# Altium PCB BuySellDisplay3.PcbDoc
Units mm, origin at the board's own origin, x right, y up, seen from the top; angles counter-clockwise.
Board outline 360 x 160 mm, 2 copper layers (Top Layer, Bottom Layer); 219 components, 207 nets, 586 pads, 108 vias.
Unrouted connection lines stored in the file: 312.
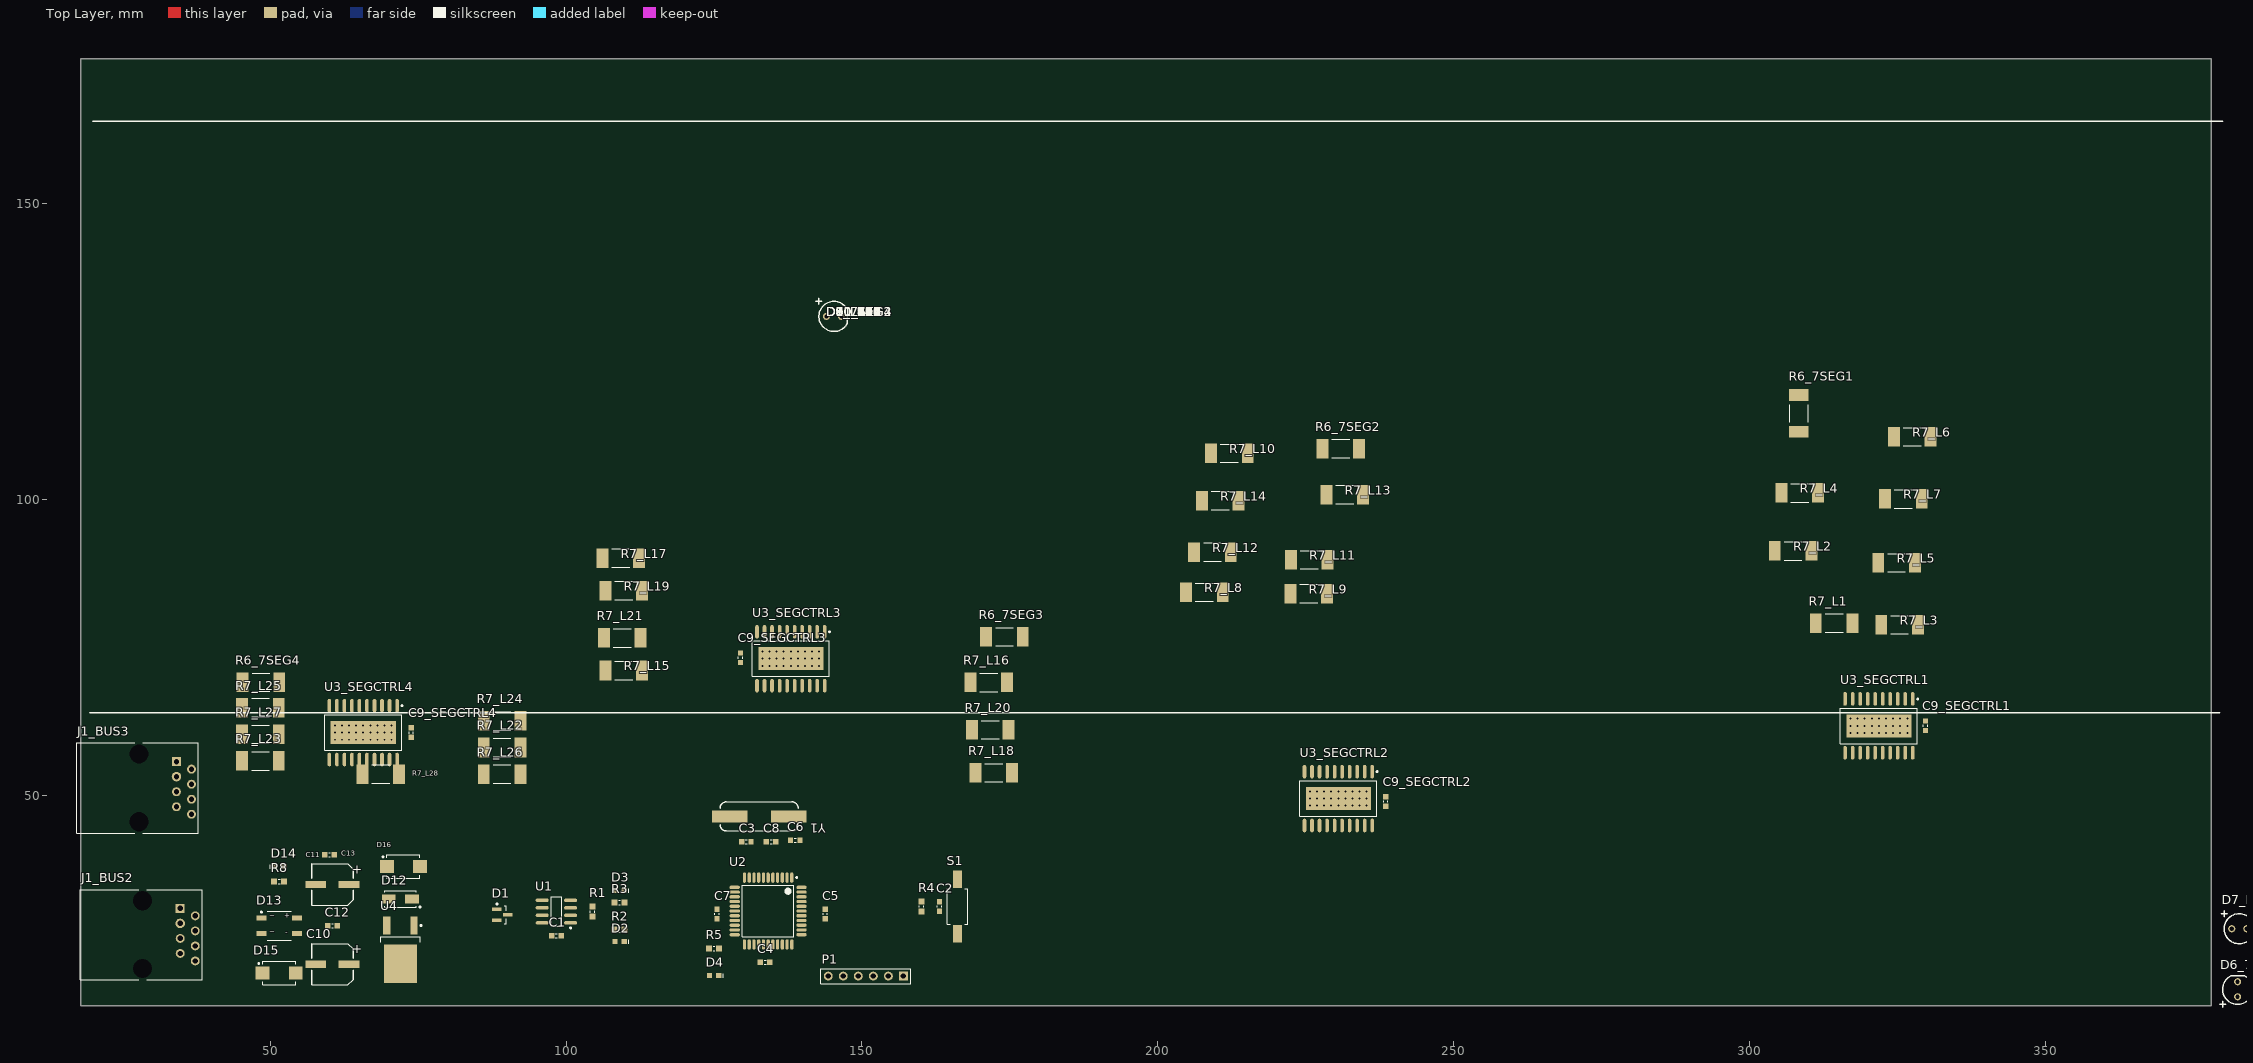
[diagram p0: Top Layer view]
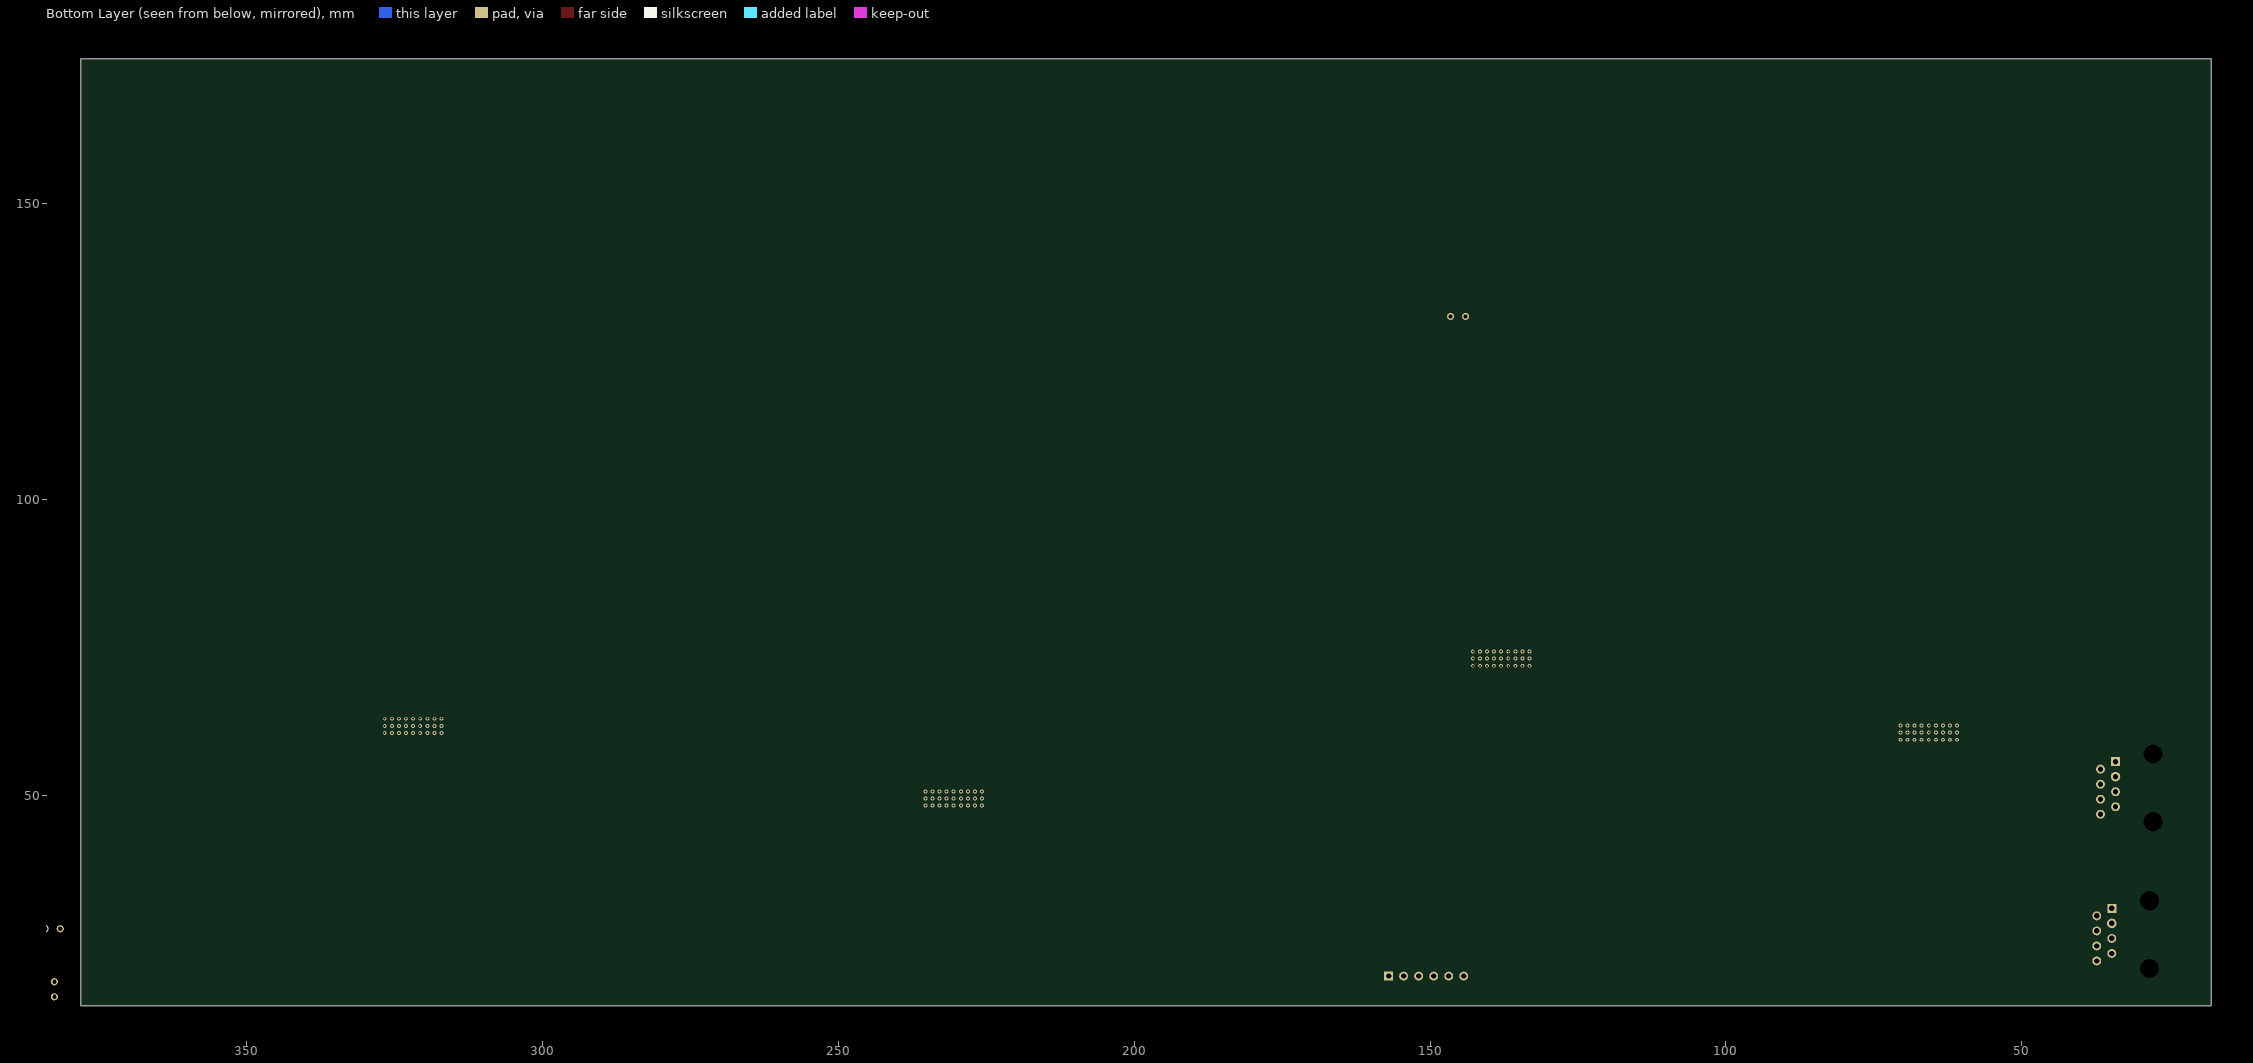
[diagram p1: Bottom Layer view, seen from below]

## Layer stack, top to bottom
Top Layer: signal copper 0.0356
Dielectric: dielectric 0.32, FR-4, Dk 4.8
Bottom Layer: signal copper 0.0356

## Board outline
18,14.5 18,174.5 378,174.5 378,14.5

## Design rules (kind name [scope] priority, off if disabled: settings)
Clearance [All] p1: gap=0.254
ComponentClearance [All] p1: gap=0.254 collisioncheckmode=3 verticalgap=0.254
PolygonConnect [All] p1: connectstyle=Relief reliefconductorwidth=0.254 reliefentries=4 polygonreliefangle="90 Angle"
RoomDefinition 7SEG1 [InComponentClass('7SEG1')] p1: confinementstyle=ConfineIn formatcopy=TRUE lockcomponents=FALSE outline 378.999,13.5 391.499,13.5 391.499,23 378.999,23
RoomDefinition 7SEG2 [InComponentClass('7SEG2')] p2: confinementstyle=ConfineIn formatcopy=TRUE lockcomponents=FALSE outline 141.497,127.997 156.497,127.997 156.497,134.497 141.497,134.497
RoomDefinition 7SEG3 [InComponentClass('7SEG3')] p3: confinementstyle=ConfineIn formatcopy=TRUE lockcomponents=FALSE outline 141.497,127.997 156.497,127.997 156.497,134.497 141.497,134.497
RoomDefinition 7SEG4 [InComponentClass('7SEG4')] p4: confinementstyle=ConfineIn formatcopy=TRUE lockcomponents=FALSE outline 141.497,127.997 156.497,127.997 156.497,134.497 141.497,134.497
RoomDefinition L1 [InComponentClass('L1')] p5: confinementstyle=ConfineIn formatcopy=TRUE lockcomponents=FALSE outline 378.999,24.5 422.499,24.5 422.499,34 378.999,34
RoomDefinition L4 [InComponentClass('L4')] p6: confinementstyle=ConfineIn formatcopy=TRUE lockcomponents=FALSE outline 141.497,127.997 152.997,127.997 152.997,134.497 141.497,134.497
RoomDefinition L6 [InComponentClass('L6')] p7: confinementstyle=ConfineIn formatcopy=TRUE lockcomponents=FALSE outline 141.497,127.997 152.997,127.997 152.997,134.497 141.497,134.497
RoomDefinition L7 [InComponentClass('L7')] p8: confinementstyle=ConfineIn formatcopy=TRUE lockcomponents=FALSE outline 141.497,127.997 152.997,127.997 152.997,134.497 141.497,134.497
RoomDefinition L9 [InComponentClass('L9')] p9: confinementstyle=ConfineIn formatcopy=TRUE lockcomponents=FALSE outline 141.497,127.997 152.997,127.997 152.997,134.497 141.497,134.497
RoomDefinition L10 [InComponentClass('L10')] p10: confinementstyle=ConfineIn formatcopy=TRUE lockcomponents=FALSE outline 141.497,127.997 154.497,127.997 154.497,134.497 141.497,134.497
RoomDefinition L11 [InComponentClass('L11')] p11: confinementstyle=ConfineIn formatcopy=TRUE lockcomponents=FALSE outline 141.497,127.997 153.997,127.997 153.997,134.497 141.497,134.497
RoomDefinition L12 [InComponentClass('L12')] p12: confinementstyle=ConfineIn formatcopy=TRUE lockcomponents=FALSE outline 141.497,127.997 154.497,127.997 154.497,134.497 141.497,134.497
RoomDefinition L14 [InComponentClass('L14')] p13: confinementstyle=ConfineIn formatcopy=TRUE lockcomponents=FALSE outline 141.497,127.997 154.497,127.997 154.497,134.497 141.497,134.497
RoomDefinition L15 [InComponentClass('L15')] p14: confinementstyle=ConfineIn formatcopy=TRUE lockcomponents=FALSE outline 141.497,127.997 154.497,127.997 154.497,134.497 141.497,134.497
RoomDefinition L16 [InComponentClass('L16')] p15: confinementstyle=ConfineIn formatcopy=TRUE lockcomponents=FALSE outline 141.497,127.997 154.497,127.997 154.497,134.497 141.497,134.497
RoomDefinition L17 [InComponentClass('L17')] p16: confinementstyle=ConfineIn formatcopy=TRUE lockcomponents=FALSE outline 141.497,127.997 154.497,127.997 154.497,134.497 141.497,134.497
RoomDefinition L18 [InComponentClass('L18')] p17: confinementstyle=ConfineIn formatcopy=TRUE lockcomponents=FALSE outline 141.497,127.997 154.497,127.997 154.497,134.497 141.497,134.497
RoomDefinition L19 [InComponentClass('L19')] p18: confinementstyle=ConfineIn formatcopy=TRUE lockcomponents=FALSE outline 141.497,127.997 154.497,127.997 154.497,134.497 141.497,134.497
RoomDefinition L20 [InComponentClass('L20')] p19: confinementstyle=ConfineIn formatcopy=TRUE lockcomponents=FALSE outline 141.497,127.997 154.497,127.997 154.497,134.497 141.497,134.497
RoomDefinition L21 [InComponentClass('L21')] p20: confinementstyle=ConfineIn formatcopy=TRUE lockcomponents=FALSE outline 141.497,127.997 153.997,127.997 153.997,134.497 141.497,134.497
RoomDefinition L22 [InComponentClass('L22')] p21: confinementstyle=ConfineIn formatcopy=TRUE lockcomponents=FALSE outline 141.497,127.997 154.497,127.997 154.497,134.497 141.497,134.497
RoomDefinition L23 [InComponentClass('L23')] p22: confinementstyle=ConfineIn formatcopy=TRUE lockcomponents=FALSE outline 141.497,127.997 154.497,127.997 154.497,134.497 141.497,134.497
RoomDefinition L24 [InComponentClass('L24')] p23: confinementstyle=ConfineIn formatcopy=TRUE lockcomponents=FALSE outline 141.497,127.997 154.497,127.997 154.497,134.497 141.497,134.497
RoomDefinition L25 [InComponentClass('L25')] p24: confinementstyle=ConfineIn formatcopy=TRUE lockcomponents=FALSE outline 141.497,127.997 154.497,127.997 154.497,134.497 141.497,134.497
RoomDefinition L26 [InComponentClass('L26')] p25: confinementstyle=ConfineIn formatcopy=TRUE lockcomponents=FALSE outline 141.497,127.997 154.497,127.997 154.497,134.497 141.497,134.497
RoomDefinition L27 [InComponentClass('L27')] p26: confinementstyle=ConfineIn formatcopy=TRUE lockcomponents=FALSE outline 141.497,127.997 154.497,127.997 154.497,134.497 141.497,134.497
RoomDefinition L28 [InComponentClass('L28')] p27: confinementstyle=ConfineIn formatcopy=TRUE lockcomponents=FALSE outline 1148.5,1253.5 1260,1253.5 1260,1085.5 1148.5,1085.5
RoomDefinition BUS2 [InComponentClass('BUS2')] p28: confinementstyle=ConfineIn formatcopy=TRUE lockcomponents=FALSE outline 17.624,34.502 17.624,18.5 41.5,18.5 41.5,34.502
RoomDefinition BUS3 [InComponentClass('BUS3')] p29: confinementstyle=ConfineIn formatcopy=TRUE lockcomponents=FALSE outline 16.5,59.288 16.5,41 38.09,41 38.09,59.288
RoomDefinition COM485 [InComponentClass('COM485')] p30: confinementstyle=ConfineIn formatcopy=TRUE lockcomponents=FALSE outline 116.639,39.534 84,39.534 84,21.5 116.639,21.5
RoomDefinition CPU [InComponentClass('CPU')] p31: confinementstyle=ConfineIn formatcopy=TRUE lockcomponents=FALSE outline 170.713,54.37 117.5,54.37 117.5,15 170.713,15
RoomDefinition L2 [InComponentClass('L2')] p32: confinementstyle=ConfineIn formatcopy=TRUE lockcomponents=FALSE outline 141.497,127.997 152.997,127.997 152.997,134.497 141.497,134.497
RoomDefinition L3 [InComponentClass('L3')] p33: confinementstyle=ConfineIn formatcopy=TRUE lockcomponents=FALSE outline 141.497,127.997 152.997,127.997 152.997,134.497 141.497,134.497
RoomDefinition L5 [InComponentClass('L5')] p34: confinementstyle=ConfineIn formatcopy=TRUE lockcomponents=FALSE outline 141.497,127.997 152.997,127.997 152.997,134.497 141.497,134.497
RoomDefinition L8 [InComponentClass('L8')] p35: confinementstyle=ConfineIn formatcopy=TRUE lockcomponents=FALSE outline 141.497,127.997 152.997,127.997 152.997,134.497 141.497,134.497
RoomDefinition L13 [InComponentClass('L13')] p36: confinementstyle=ConfineIn formatcopy=TRUE lockcomponents=FALSE outline 141.497,127.997 154.497,127.997 154.497,134.497 141.497,134.497
RoomDefinition SEGCTRL1 [InComponentClass('SEGCTRL1')] p37: confinementstyle=ConfineIn formatcopy=TRUE lockcomponents=FALSE outline 304.337,43 338.5,43 338.5,71.448 304.337,71.448
RoomDefinition SEGCTRL2 [InComponentClass('SEGCTRL2')] p38: confinementstyle=ConfineIn formatcopy=TRUE lockcomponents=FALSE outline 214.5,70.5 214.5,42.5 256.5,42.5 256.5,70.5
RoomDefinition SEGCTRL3 [InComponentClass('SEGCTRL3')] p39: confinementstyle=ConfineIn formatcopy=TRUE lockcomponents=FALSE outline 122.5,85 122.5,56.64 154,56.64 154,85
RoomDefinition SEGCTRL4 [InComponentClass('SEGCTRL4')] p40: confinementstyle=ConfineIn formatcopy=TRUE lockcomponents=FALSE outline 57.322,51.5 84.5,51.5 84.5,70.042 57.322,70.042
RoomDefinition SUPPLY [InComponentClass('SUPPLY')] p41: confinementstyle=ConfineIn formatcopy=TRUE lockcomponents=FALSE outline 44,15.5 112.453,15.5 112.453,45.732 44,45.732
RoutingVias [All] p1: holewidth=0.711 width=1.27 viastyle="Through Hole" minholewidth=0.711 minwidth=1.27 maxholewidth=0.711 maxwidth=1.27
SolderMaskExpansion [All] p1: expansion=0.102
TestPointUsage [All] p1: valid=0 allowmultiple=FALSE
Testpoint [All] p1: side=15 testpointundercomponent=TRUE minsize=1.016 maxsize=2.54 preferedsize=1.524 minholesize=0 maxholesize=1.016 preferedholesize=0.813 testpointgrid=0.025 style=1023 order=0123456789
Width [All] p1: maxlimit=0.254 minlimit=0.254 preferedwidth=0.254
18 further rules are at their usual default settings.

## Classes and differential pairs
channel class TPIC6B595_CommunicationInterface: SEGCTRL1 SEGCTRL2 SEGCTRL3 SEGCTRL4
channel class Line: L1 L2 L3 L4 L5 L6 L7 L8 L9 L10 L11 L12 L13 L14 L15 L16 L17 L18 L19 L20 L21 L22 L23 L24 L25 L26 L27 L28
channel class Led7Seg: 7SEG1 7SEG2 7SEG3 7SEG4
channel class BUSConnector: BUS2 BUS3
component class SUPPLY: C10 C11 C12 C13 D12 D13 D14 D15 D16 R8 U4
component class SEGCTRL4: C9_SEGCTRL4 U3_SEGCTRL4
component class SEGCTRL3: C9_SEGCTRL3 U3_SEGCTRL3
component class SEGCTRL2: C9_SEGCTRL2 U3_SEGCTRL2
component class SEGCTRL1: C9_SEGCTRL1 U3_SEGCTRL1
component class L28: D7_L28 D8_L28 D9_L28 D10_L28 D11_L28 R7_L28
component class L27: D7_L27 D8_L27 D9_L27 D10_L27 D11_L27 R7_L27
component class L26: D7_L26 D8_L26 D9_L26 D10_L26 D11_L26 R7_L26
component class L25: D7_L25 D8_L25 D9_L25 D10_L25 D11_L25 R7_L25
component class L24: D7_L24 D8_L24 D9_L24 D10_L24 D11_L24 R7_L24
component class L23: D7_L23 D8_L23 D9_L23 D10_L23 D11_L23 R7_L23
component class L22: D7_L22 D8_L22 D9_L22 D10_L22 D11_L22 R7_L22
component class L21: D7_L21 D8_L21 D9_L21 D10_L21 D11_L21 R7_L21
component class L20: D7_L20 D8_L20 D9_L20 D10_L20 D11_L20 R7_L20
component class L19: D7_L19 D8_L19 D9_L19 D10_L19 D11_L19 R7_L19
component class L18: D7_L18 D8_L18 D9_L18 D10_L18 D11_L18 R7_L18
component class L17: D7_L17 D8_L17 D9_L17 D10_L17 D11_L17 R7_L17
component class L16: D7_L16 D8_L16 D9_L16 D10_L16 D11_L16 R7_L16
component class L15: D7_L15 D8_L15 D9_L15 D10_L15 D11_L15 R7_L15
component class L14: D7_L14 D8_L14 D9_L14 D10_L14 D11_L14 R7_L14
component class L13: D7_L13 D8_L13 D9_L13 D10_L13 D11_L13 R7_L13
component class L12: D7_L12 D8_L12 D9_L12 D10_L12 D11_L12 R7_L12
component class L11: D7_L11 D8_L11 D9_L11 D10_L11 D11_L11 R7_L11
component class L10: D7_L10 D8_L10 D9_L10 D10_L10 D11_L10 R7_L10
component class L9: D7_L9 D8_L9 D9_L9 D10_L9 D11_L9 R7_L9
component class L8: D7_L8 D8_L8 D9_L8 D10_L8 D11_L8 R7_L8
component class L7: D7_L7 D8_L7 D9_L7 D10_L7 D11_L7 R7_L7
component class L6: D7_L6 D8_L6 D9_L6 D10_L6 D11_L6 R7_L6
component class L5: D7_L5 D8_L5 D9_L5 D10_L5 D11_L5 R7_L5
component class L4: D7_L4 D8_L4 D9_L4 D10_L4 D11_L4 R7_L4
component class L3: D7_L3 D8_L3 D9_L3 D10_L3 D11_L3 R7_L3
component class L2: D7_L2 D8_L2 D9_L2 D10_L2 D11_L2 R7_L2
component class L1: D7_L1 D8_L1 D9_L1 D10_L1 D11_L1 R7_L1
component class CPU: C2 C3 C4 C5 C6 C7 C8 D4 P1 R4 R5 S1 U2 Y1
component class COM485: C1 D1 D2 D3 R1 R2 R3 U1
component class BUS3: J1_BUS3
component class BUS2: J1_BUS2
component class 7SEG4: D6_7SEG4 R6_7SEG4
component class 7SEG3: D6_7SEG3 R6_7SEG3
component class 7SEG2: D6_7SEG2 R6_7SEG2
component class 7SEG1: D6_7SEG1 R6_7SEG1

## Components (designator, comment, footprint, x,y, rotation, side; value= is the part's Value field where it differs from the comment)
C1 "CAP0.1uF" CAP0603 98.351,26.326 r0 top
C2 "CAP0.1uF" CAP0603 163.093,31.256 r270 top
C3 "C18pF" CAP0603 130.454,42.178 r180 top
C4 "CAP0.1uF" CAP0603 133.629,21.858 r0 top
C5 "CAP0.1uF" CAP0603 143.789,29.986 r90 top
C6 "CAP0.1uF" CAP0603 138.709,42.432 r0 top
C7 "CAP0.1uF" CAP0603 125.501,29.986 r270 top
C8 "C18pF" CAP0603 134.645,42.178 r0 top
C9_SEGCTRL1 "CAP0.1uF" CAP0603 329.737,61.796 r270 top (schematic designator C9)
C9_SEGCTRL2 "CAP0.1uF" CAP0603 238.5,49 r270 top (schematic designator C9)
C9_SEGCTRL3 "CAP0.1uF" CAP0603 129.472,73.29 r270 top (schematic designator C9)
C9_SEGCTRL4 "CAP0.1uF" CAP0603 73.832,60.644 r270 top (schematic designator C9)
C10 "EEH-ZA1E101XP" EEH-ZA1E101XP 60.5,21.5 r180 top
C11 "25SVPF47M" EEH-ZA1E101XP 60.5,35 r180 top
C12 "CAP0.1uF" CAP0603 60.5,28 r180 top
C13 "CAP0.1uF" CAP0603 60,40 r180 top
D1 "SM712" SW712 89.207,29.882 r0 top
D2 "150060YS75000" 150060YS75000 109.019,25.31 r180 top
D3 "150060YS75000" 150060YS75000 109.019,33.946 r180 top
D4 "150060YS75000" 150060YS75000 124.993,19.572 r180 top
D6_7SEG1 "HBLED" LED 382.499,16 r90 top (schematic designator D6)
D6_7SEG2 "HBLED" LED 143.987,130.987 r0 top (schematic designator D6)
D6_7SEG3 "HBLED" LED 143.987,130.987 r0 top (schematic designator D6)
D6_7SEG4 "HBLED" LED 143.987,130.987 r0 top (schematic designator D6)
D7_L1 "HBLED" LED 381.499,27.5 r0 top (schematic designator D7)
D7_L2 "HBLED" LED 143.987,130.987 r0 top (schematic designator D7)
D7_L3 "HBLED" LED 143.987,130.987 r0 top (schematic designator D7)
D7_L4 "HBLED" LED 143.987,130.987 r0 top (schematic designator D7)
D7_L5 "HBLED" LED 143.987,130.987 r0 top (schematic designator D7)
D7_L6 "HBLED" LED 143.987,130.987 r0 top (schematic designator D7)
D7_L7 "HBLED" LED 143.987,130.987 r0 top (schematic designator D7)
D7_L8 "HBLED" LED 143.987,130.987 r0 top (schematic designator D7)
D7_L9 "HBLED" LED 143.987,130.987 r0 top (schematic designator D7)
D7_L10 "HBLED" LED 143.987,130.987 r0 top (schematic designator D7)
D7_L11 "HBLED" LED 143.987,130.987 r0 top (schematic designator D7)
D7_L12 "HBLED" LED 143.987,130.987 r0 top (schematic designator D7)
D7_L13 "HBLED" LED 143.987,130.987 r0 top (schematic designator D7)
D7_L14 "HBLED" LED 143.987,130.987 r0 top (schematic designator D7)
D7_L15 "HBLED" LED 143.987,130.987 r0 top (schematic designator D7)
D7_L16 "HBLED" LED 143.987,130.987 r0 top (schematic designator D7)
D7_L17 "HBLED" LED 143.987,130.987 r0 top (schematic designator D7)
D7_L18 "HBLED" LED 143.987,130.987 r0 top (schematic designator D7)
D7_L19 "HBLED" LED 143.987,130.987 r0 top (schematic designator D7)
D7_L20 "HBLED" LED 143.987,130.987 r0 top (schematic designator D7)
D7_L21 "HBLED" LED 143.987,130.987 r0 top (schematic designator D7)
D7_L22 "HBLED" LED 143.987,130.987 r0 top (schematic designator D7)
D7_L23 "HBLED" LED 143.987,130.987 r0 top (schematic designator D7)
D7_L24 "HBLED" LED 143.987,130.987 r0 top (schematic designator D7)
D7_L25 "HBLED" LED 143.987,130.987 r0 top (schematic designator D7)
D7_L26 "HBLED" LED 143.987,130.987 r0 top (schematic designator D7)
D7_L27 "HBLED" LED 143.987,130.987 r0 top (schematic designator D7)
D7_L28 "HBLED" LED 1205.49,1142.49 r0 top (schematic designator D7)
D8_L1 "HBLED" LED 389.999,27.5 r0 top (schematic designator D8)
D8_L2 "HBLED" LED 143.987,130.987 r0 top (schematic designator D8)
D8_L3 "HBLED" LED 143.987,130.987 r0 top (schematic designator D8)
D8_L4 "HBLED" LED 143.987,130.987 r0 top (schematic designator D8)
D8_L5 "HBLED" LED 143.987,130.987 r0 top (schematic designator D8)
D8_L6 "HBLED" LED 143.987,130.987 r0 top (schematic designator D8)
D8_L7 "HBLED" LED 143.987,130.987 r0 top (schematic designator D8)
D8_L8 "HBLED" LED 143.987,130.987 r0 top (schematic designator D8)
D8_L9 "HBLED" LED 143.987,130.987 r0 top (schematic designator D8)
D8_L10 "HBLED" LED 143.987,130.987 r0 top (schematic designator D8)
D8_L11 "HBLED" LED 143.987,130.987 r0 top (schematic designator D8)
D8_L12 "HBLED" LED 143.987,130.987 r0 top (schematic designator D8)
D8_L13 "HBLED" LED 143.987,130.987 r0 top (schematic designator D8)
D8_L14 "HBLED" LED 143.987,130.987 r0 top (schematic designator D8)
D8_L15 "HBLED" LED 143.987,130.987 r0 top (schematic designator D8)
D8_L16 "HBLED" LED 143.987,130.987 r0 top (schematic designator D8)
D8_L17 "HBLED" LED 143.987,130.987 r0 top (schematic designator D8)
D8_L18 "HBLED" LED 143.987,130.987 r0 top (schematic designator D8)
D8_L19 "HBLED" LED 143.987,130.987 r0 top (schematic designator D8)
D8_L20 "HBLED" LED 143.987,130.987 r0 top (schematic designator D8)
D8_L21 "HBLED" LED 143.987,130.987 r0 top (schematic designator D8)
D8_L22 "HBLED" LED 143.987,130.987 r0 top (schematic designator D8)
D8_L23 "HBLED" LED 143.987,130.987 r0 top (schematic designator D8)
D8_L24 "HBLED" LED 143.987,130.987 r0 top (schematic designator D8)
D8_L25 "HBLED" LED 143.987,130.987 r0 top (schematic designator D8)
D8_L26 "HBLED" LED 143.987,130.987 r0 top (schematic designator D8)
D8_L27 "HBLED" LED 143.987,130.987 r0 top (schematic designator D8)
D8_L28 "HBLED" LED 1205.49,1142.49 r0 top (schematic designator D8)
D9_L1 "HBLED" LED 397.999,27.5 r0 top (schematic designator D9)
D9_L2 "HBLED" LED 143.987,130.987 r0 top (schematic designator D9)
D9_L3 "HBLED" LED 143.987,130.987 r0 top (schematic designator D9)
D9_L4 "HBLED" LED 143.987,130.987 r0 top (schematic designator D9)
D9_L5 "HBLED" LED 143.987,130.987 r0 top (schematic designator D9)
D9_L6 "HBLED" LED 143.987,130.987 r0 top (schematic designator D9)
D9_L7 "HBLED" LED 143.987,130.987 r0 top (schematic designator D9)
D9_L8 "HBLED" LED 143.987,130.987 r0 top (schematic designator D9)
D9_L9 "HBLED" LED 143.987,130.987 r0 top (schematic designator D9)
D9_L10 "HBLED" LED 143.987,130.987 r0 top (schematic designator D9)
D9_L11 "HBLED" LED 143.987,130.987 r0 top (schematic designator D9)
D9_L12 "HBLED" LED 143.987,130.987 r0 top (schematic designator D9)
D9_L13 "HBLED" LED 143.987,130.987 r0 top (schematic designator D9)
D9_L14 "HBLED" LED 143.987,130.987 r0 top (schematic designator D9)
D9_L15 "HBLED" LED 143.987,130.987 r0 top (schematic designator D9)
D9_L16 "HBLED" LED 143.987,130.987 r0 top (schematic designator D9)
D9_L17 "HBLED" LED 143.987,130.987 r0 top (schematic designator D9)
D9_L18 "HBLED" LED 143.987,130.987 r0 top (schematic designator D9)
D9_L19 "HBLED" LED 143.987,130.987 r0 top (schematic designator D9)
D9_L20 "HBLED" LED 143.987,130.987 r0 top (schematic designator D9)
D9_L21 "HBLED" LED 143.987,130.987 r0 top (schematic designator D9)
D9_L22 "HBLED" LED 143.987,130.987 r0 top (schematic designator D9)
D9_L23 "HBLED" LED 143.987,130.987 r0 top (schematic designator D9)
D9_L24 "HBLED" LED 143.987,130.987 r0 top (schematic designator D9)
D9_L25 "HBLED" LED 143.987,130.987 r0 top (schematic designator D9)
D9_L26 "HBLED" LED 143.987,130.987 r0 top (schematic designator D9)
D9_L27 "HBLED" LED 143.987,130.987 r0 top (schematic designator D9)
D9_L28 "HBLED" LED 1205.49,1142.49 r0 top (schematic designator D9)
D10_L1 "HBLED" LED 406.499,27.5 r0 top (schematic designator D10)
D10_L2 "HBLED" LED 143.987,130.987 r0 top (schematic designator D10)
D10_L3 "HBLED" LED 143.987,130.987 r0 top (schematic designator D10)
D10_L4 "HBLED" LED 143.987,130.987 r0 top (schematic designator D10)
D10_L5 "HBLED" LED 143.987,130.987 r0 top (schematic designator D10)
D10_L6 "HBLED" LED 143.987,130.987 r0 top (schematic designator D10)
D10_L7 "HBLED" LED 143.987,130.987 r0 top (schematic designator D10)
D10_L8 "HBLED" LED 143.987,130.987 r0 top (schematic designator D10)
D10_L9 "HBLED" LED 143.987,130.987 r0 top (schematic designator D10)
D10_L10 "HBLED" LED 143.987,130.987 r0 top (schematic designator D10)
D10_L11 "HBLED" LED 143.987,130.987 r0 top (schematic designator D10)
D10_L12 "HBLED" LED 143.987,130.987 r0 top (schematic designator D10)
D10_L13 "HBLED" LED 143.987,130.987 r0 top (schematic designator D10)
D10_L14 "HBLED" LED 143.987,130.987 r0 top (schematic designator D10)
D10_L15 "HBLED" LED 143.987,130.987 r0 top (schematic designator D10)
D10_L16 "HBLED" LED 143.987,130.987 r0 top (schematic designator D10)
D10_L17 "HBLED" LED 143.987,130.987 r0 top (schematic designator D10)
D10_L18 "HBLED" LED 143.987,130.987 r0 top (schematic designator D10)
D10_L19 "HBLED" LED 143.987,130.987 r0 top (schematic designator D10)
D10_L20 "HBLED" LED 143.987,130.987 r0 top (schematic designator D10)
D10_L21 "HBLED" LED 143.987,130.987 r0 top (schematic designator D10)
D10_L22 "HBLED" LED 143.987,130.987 r0 top (schematic designator D10)
D10_L23 "HBLED" LED 143.987,130.987 r0 top (schematic designator D10)
D10_L24 "HBLED" LED 143.987,130.987 r0 top (schematic designator D10)
D10_L25 "HBLED" LED 143.987,130.987 r0 top (schematic designator D10)
D10_L26 "HBLED" LED 143.987,130.987 r0 top (schematic designator D10)
D10_L27 "HBLED" LED 143.987,130.987 r0 top (schematic designator D10)
D10_L28 "HBLED" LED 1205.49,1142.49 r0 top (schematic designator D10)
D11_L1 "HBLED" LED 415.999,27.5 r0 top (schematic designator D11)
D11_L2 "HBLED" LED 143.987,130.987 r0 top (schematic designator D11)
D11_L3 "HBLED" LED 143.987,130.987 r0 top (schematic designator D11)
D11_L4 "HBLED" LED 143.987,130.987 r0 top (schematic designator D11)
D11_L5 "HBLED" LED 143.987,130.987 r0 top (schematic designator D11)
D11_L6 "HBLED" LED 143.987,130.987 r0 top (schematic designator D11)
D11_L7 "HBLED" LED 143.987,130.987 r0 top (schematic designator D11)
D11_L8 "HBLED" LED 143.987,130.987 r0 top (schematic designator D11)
D11_L9 "HBLED" LED 143.987,130.987 r0 top (schematic designator D11)
D11_L10 "HBLED" LED 143.987,130.987 r0 top (schematic designator D11)
D11_L11 "HBLED" LED 143.987,130.987 r0 top (schematic designator D11)
D11_L12 "HBLED" LED 143.987,130.987 r0 top (schematic designator D11)
D11_L13 "HBLED" LED 143.987,130.987 r0 top (schematic designator D11)
D11_L14 "HBLED" LED 143.987,130.987 r0 top (schematic designator D11)
D11_L15 "HBLED" LED 143.987,130.987 r0 top (schematic designator D11)
D11_L16 "HBLED" LED 143.987,130.987 r0 top (schematic designator D11)
D11_L17 "HBLED" LED 143.987,130.987 r0 top (schematic designator D11)
D11_L18 "HBLED" LED 143.987,130.987 r0 top (schematic designator D11)
D11_L19 "HBLED" LED 143.987,130.987 r0 top (schematic designator D11)
D11_L20 "HBLED" LED 143.987,130.987 r0 top (schematic designator D11)
D11_L21 "HBLED" LED 143.987,130.987 r0 top (schematic designator D11)
D11_L22 "HBLED" LED 143.987,130.987 r0 top (schematic designator D11)
D11_L23 "HBLED" LED 143.987,130.987 r0 top (schematic designator D11)
D11_L24 "HBLED" LED 143.987,130.987 r0 top (schematic designator D11)
D11_L25 "HBLED" LED 143.987,130.987 r0 top (schematic designator D11)
D11_L26 "HBLED" LED 143.987,130.987 r0 top (schematic designator D11)
D11_L27 "HBLED" LED 143.987,130.987 r0 top (schematic designator D11)
D11_L28 "HBLED" LED 1205.49,1142.49 r0 top (schematic designator D11)
D12 "S1M-E3/5AT" S1M-E3/5AT 72,32.5 r180 top
D13 "MB6S-E3/80" MB6S-E3/80 51.5,28 r0 top
D14 "150060YS75000" 150060YS75000 51.5,38 r0 top
D15 "SMBJ12A-E3/52" SMBJ5.0A 51.5,20 r0 top
D16 "SMBJ5.0A" SMBJ5.0A 72.5,38 r0 top
J1_BUS2 "15-43-6233" 15-43-6233 17.878,26.501 r270 top (schematic designator J1)
J1_BUS3 "15-43-6233" 15-43-6233 17.249,51.3 r270 top (schematic designator J1)
P1 "Header 6" HDR1X6 157,19.5 r180 top
R1 "RK73B1HTTC472J" RES0603 104.447,30.39 r270 top
R2 "RK73B1HTTC472J" RES0603 109.019,27.342 r180 top
R3 "RK73B1HTTC472J" RES0603 109.019,31.914 r180 top
R4 "RK73B1HTTC472J" RES0603 160.045,31.256 r270 top
R5 "RK73B1HTTC472J" RES0603 124.993,24.144 r180 top
R6_7SEG1 "CRCW2512470RJNEG" RES2512 308.358,114.588 r270 top (schematic designator R6)
R6_7SEG2 "CRCW2512470RJNEG" RES2512 230.922,108.646 r0 top (schematic designator R6)
R6_7SEG3 "CRCW2512470RJNEG" RES2512 174.078,76.854 r180 top (schematic designator R6)
R6_7SEG4 "CRCW2512470RJNEG" RES2512 48.422,69.146 r0 top (schematic designator R6)
R7_L1 "CRCW2512120RJNEG" RES2512 314.301,79.166 r180 top (schematic designator R7)
R7_L2 "CRCW2512120RJNEG" RES2512 307.358,91.368 r0 top (schematic designator R7)
R7_L3 "CRCW2512120RJNEG" RES2512 325.358,78.868 r0 top (schematic designator R7)
R7_L4 "CRCW2512120RJNEG" RES2512 308.494,101.146 r0 top (schematic designator R7)
R7_L5 "CRCW2512120RJNEG" RES2512 324.858,89.368 r0 top (schematic designator R7)
R7_L6 "CRCW2512120RJNEG" RES2512 327.494,110.646 r0 top (schematic designator R7)
R7_L7 "CRCW2512120RJNEG" RES2512 325.994,100.146 r0 top (schematic designator R7)
R7_L8 "CRCW2512120RJNEG" RES2512 207.858,84.368 r0 top (schematic designator R7)
R7_L9 "CRCW2512120RJNEG" RES2512 225.494,84.146 r0 top (schematic designator R7)
R7_L10 "CRCW2512120RJNEG" RES2512 212.088,107.868 r0 top (schematic designator R7)
R7_L11 "CRCW2512120RJNEG" RES2512 225.596,89.868 r0 top (schematic designator R7)
R7_L12 "CRCW2512120RJNEG" RES2512 209.224,91.146 r0 top (schematic designator R7)
R7_L13 "CRCW2512120RJNEG" RES2512 231.588,100.868 r0 top (schematic designator R7)
R7_L14 "CRCW2512120RJNEG" RES2512 210.55,99.868 r0 top (schematic designator R7)
R7_L15 "CRCW2512120RJNEG" RES2512 109.724,71.146 r0 top (schematic designator R7)
R7_L16 "CRCW2512120RJNEG" RES2512 171.412,69.132 r180 top (schematic designator R7)
R7_L17 "CRCW2512120RJNEG" RES2512 109.224,90.146 r0 top (schematic designator R7)
R7_L18 "CRCW2512120RJNEG" RES2512 172.276,53.854 r180 top (schematic designator R7)
R7_L19 "CRCW2512120RJNEG" RES2512 109.724,84.646 r0 top (schematic designator R7)
R7_L20 "CRCW2512120RJNEG" RES2512 171.666,61.132 r180 top (schematic designator R7)
R7_L21 "CRCW2512120RJNEG" RES2512 109.478,76.646 r0 top (schematic designator R7)
R7_L22 "CRCW2512120RJNEG" RES2512 89.166,58.132 r180 top (schematic designator R7)
R7_L23 "CRCW2512120RJNEG" RES2512 48.334,55.868 r0 top (schematic designator R7)
R7_L24 "CRCW2512120RJNEG" RES2512 89.166,62.632 r180 top (schematic designator R7)
R7_L25 "CRCW2512120RJNEG" RES2512 48.334,64.868 r0 top (schematic designator R7)
R7_L26 "CRCW2512120RJNEG" RES2512 89.166,53.632 r180 top (schematic designator R7)
R7_L27 "CRCW2512120RJNEG" RES2512 48.334,60.368 r0 top (schematic designator R7)
R7_L28 "CRCW2512120RJNEG" RES2512 68.669,53.635 r180 top (schematic designator R7)
R8 "RK73B1HTTC472J" RES0603 51.5,35.5 r0 top
S1 "SW-PB" microswitch 166.141,31.256 r270 top
U1 "MAX485CSA" NSO8_N 98.351,30.39 r180 top
U2 "ATmega1284P-AU" 44A_N 134.137,30.494 r270 top
U3_SEGCTRL1 "TPIC6B595" TPIC6B595DWR 321.863,61.796 r270 top (schematic designator U3)
U3_SEGCTRL2 "TPIC6B595" TPIC6B595DWR 230.5,49.5 r270 top (schematic designator U3)
U3_SEGCTRL3 "TPIC6B595" TPIC6B595DWR 137.97,73.14 r270 top (schematic designator U3)
U3_SEGCTRL4 "TPIC6B595" TPIC6B595DWR 65.704,60.644 r270 top (schematic designator U3)
U4 "MC7805CDTRKG" MC7805CDTRKG 72,24 r270 top
Y1 "XTAL" Crystal20MHz 132.613,46.496 r180 top

## Footprints (in the part's own frame and the unit in brackets; to place one, negate y for a bottom-side part, rotate by r counter-clockwise, add the part's x,y. Pads: shape width x height; smd on the part's side, far side on the other; paste and mask are expansions set on the pad)
15-43-6233 [mm] "Connector; PCB Jack, Thru-Hole; 1-Port; Unshielded without Lightpipes; Right Angle"
  rect 1.5x1.5 hole 0.9: 1(-4.445,16.89)
  round 1.5 hole 0.9: 2(-3.175,19.43) 4(-0.635,19.43) 5(0.635,16.89) 6(1.905,19.43) 7(3.175,16.89) 8(4.445,19.43)
  round 1.6 hole 0.9: 3(-1.905,16.89)
  round 2.95 hole 3.25 unplated: MH1(-5.715,10.54) MH2(5.715,10.54)
  silkscreen extent -7.62,0 7.62,20.58
44A_N [mm] "Thin QFP, 44-Leads, Body 10x10mm, Pitch 0.8mm, IPC Medium Density"
  oval 1.75x0.55 smd: 1(-5.65,4) 2(-5.65,3.2) 3(-5.65,2.4) 4(-5.65,1.6) 5(-5.65,0.8) 6(-5.65,0) 7(-5.65,-0.8) 8(-5.65,-1.6) 9(-5.65,-2.4) 10(-5.65,-3.2) 11(-5.65,-4) 23(5.65,-4) 24(5.65,-3.2) 25(5.65,-2.4) 26(5.65,-1.6) 27(5.65,-0.8) 28(5.65,0) 29(5.65,0.8) 30(5.65,1.6) 31(5.65,2.4) 32(5.65,3.2) 33(5.65,4)
  oval 0.55x1.75 smd: 12(-4,-5.65) 13(-3.2,-5.65) 14(-2.4,-5.65) 15(-1.6,-5.65) 16(-0.8,-5.65) 17(0,-5.65) 18(0.8,-5.65) 19(1.6,-5.65) 20(2.4,-5.65) 21(3.2,-5.65) 22(4,-5.65) 34(4,5.65) 35(3.2,5.65) 36(2.4,5.65) 37(1.6,5.65) 38(0.8,5.65) 39(0,5.65) 40(-0.8,5.65) 41(-1.6,5.65) 42(-2.4,5.65) 43(-3.2,5.65) 44(-4,5.65)
  silkscreen extent -5.77,-4.35 4.35,4.95, body extent -5,-5 5,5, height 1.2
150060YS75000 [mm]
  rect 0.85x0.85 smd: 1(-0.8,0) 2(0.8,0)
  silkscreen extent -1.53,-0.33 -1.53,0.33, body extent -0.85,-0.45 0.85,0.45, height 2.44
CAP0603 [mm] "Capacitores cerámicos de capas múltiples (MLCC) - SMD/SMT 0603 0.1uF 16volts X7R 5%"
  rect 0.9x0.9 smd: 1(-0.8,0) 2(0.8,0)
  silkscreen extent -0.15,-0.35 0.15,0.35, body extent -0.83,-0.43 0.82,0.42, height 0.85
Crystal20MHz [mm]
  rect 6x2 smd: 1(-5,0) 2(5,0)
  silkscreen extent -6.64,-2.45 6.6,2.45, body extent -6.6,-2.4 6.6,2.4, height 4.3
EEH-ZA1E101XP [mm] "EEH-ZA1E101XP"
  rect 3.5x1.2 smd: 1(-2.794,0) 2(2.794,0)
  silkscreen extent -3.5,-3.5 3.5,3.5
HDR1X6 [mm] "Connector; Header; 6 Position"
  rect 1.5x1.5 hole 0.9: 1(0,0)
  round 1.5 hole 0.9: 2(2.54,0) 3(5.08,0) 4(7.62,0) 5(10.16,0) 6(12.7,0)
  silkscreen extent -1.27,-1.27 13.97,1.27
LED [mm]
  round 1.2 hole 0.7: A(0,0) K(2.54,0)
  silkscreen extent -1.78,-2.54 3.56,3.05
MB6S-E3/80 [mm] "MB6S-E3/80"
  rect 1.7x0.85 smd: 1(-3,1.335) 2(-3,-1.335) 3(3,-1.335) 4(3,1.335)
  silkscreen extent -3.12,-2.45 2.05,2.45, body extent -2.05,-2.47 2.05,2.48, height 2.9
MC7805CDTRKG [mm] "MC7805CDTRKG"
  rect 3.05x1.25 smd: 1(-4.05,2.29) 3(-4.05,-2.29)
  rect 6.5x5.55 smd: 4(2.4,0)
  silkscreen extent -4.17,-3.35 -1.25,3.59, body extent -2.5,-3.37 3.72,3.37, height 2.38
microswitch [mm]
  rect 3x1.6 smd: 1(-4.59,0) 2(4.59,0)
  silkscreen extent -3,-1.75 3,1.75, body extent -3,-1.75 3,1.75, height 4.57
NSO8_N [mm] "SOIC, 8-Leads, Body 4.9x3.9mm, Pitch 1.27mm, IPC Medium Density"
  oval 2.2x0.6 smd: 1(-2.4,1.905) 2(-2.4,0.635) 3(-2.4,-0.635) 4(-2.4,-1.905) 5(2.4,-1.905) 6(2.4,-0.635) 7(2.4,0.635) 8(2.4,1.905)
  silkscreen extent -2.53,-2.5 0.9,2.88, body extent -1.95,-2.45 1.95,2.45, height 1.75
RES0603 [mm]
  rect 1x1 smd: 1(-0.85,0) 2(0.85,0)
  silkscreen extent -0.15,-0.4 0.15,0.4, body extent -0.9,-0.45 0.9,0.45, height 0.55
RES2512 [mm]
  rect 2x3.3 smd: 1(-3.1,0) 2(3.1,0)
  silkscreen extent -1.5,-1.55 1.5,1.55, body extent -3.15,-1.58 3.15,1.57, height 0.7
S1M-E3/5AT [mm] "S1M-E3/5AT"
  rect 2.35x1.55 smd: 1(-1.975,0) 2(1.975,0)
  silkscreen extent -3.43,-1.4 2.65,1.45, body extent -2.64,-1.4 2.64,1.39, height 2.29
SMBJ5.0A [mm]
  rect 2.35x2.2 smd: 1(-2.8,0) 2(2.8,0)
  silkscreen extent -3.57,-2 2.8,2, body extent -2.8,-1.97 2.79,1.97, height 2.44
SW712 [mm] "SM712 Series 600W Asymmetrical TVS Diode Array"
  rect 1.6x0.6 smd: 1(-0.9,0.95) 2(-0.9,-0.95) 3(0.9,0)
  silkscreen extent -1.02,-1.5 0.7,1.92, body extent -0.7,-1.52 0.7,1.52, height 1.12
TPIC6B595DWR [mm] "SOIC, 20-Leads, Body 13.0x7.6mm (max), Pitch 1.27mm, IPC Medium Density"
  oval 2.3x0.6 smd: 1(-4.55,5.715) 2(-4.55,4.445) 3(-4.55,3.175) 4(-4.55,1.905) 5(-4.55,0.635) 6(-4.55,-0.635) 7(-4.55,-1.905) 8(-4.55,-3.175) 9(-4.55,-4.445) 10(-4.55,-5.715) 11(4.55,-5.715) 12(4.55,-4.445) 13(4.55,-3.175) 14(4.55,-1.905) 15(4.55,-0.635) 16(4.55,0.635) 17(4.55,1.905) 18(4.55,3.175) 19(4.55,4.445) 20(4.55,5.715)
  rect 3.9x11 smd: 21(0,0)
  silkscreen extent -4.67,-6.5 3,6.69, body extent -3.8,-6.5 3.8,6.5, height 2.65

## Part data
C1 C2 C4 C5 C6 C7 C9_SEGCTRL1 C9_SEGCTRL2 C9_SEGCTRL3 C9_SEGCTRL4 C12 C13: library part C0.1UF, "Capacitores cerámicos de capas múltiples (MLCC) - SMD/SMT 0603 0.1uF 16volts X7R 5%"
C3 C8: "GJM0336C1E180JB01D"
D2 D3 D4 D14 D15 D16: "NPN General Purpose Amplifier"
J1_BUS2 J1_BUS3: "Right Angle, Standard Profile, RJ45-Keyed, Flange Mount PCB Jack"
P1: "Header, 6-Pin"
S1: "Switch"
U1: "Low-Power, Slew-Rate-Limited RS-485/RS-422 Transceiver"
U2: "20 MHz 8-bit AVR Microcontroller with 128KB Flash, 44-Pin TQFP Pkg, Industrial Temp"
U3_SEGCTRL1 U3_SEGCTRL2 U3_SEGCTRL3 U3_SEGCTRL4: library part TPIC6B595DWR, "HIGH POWER SHIFT REGISTER"
Y1: "Crystal Oscillator"

## Via types
v1: diameter 0.66, hole 0.33, Top Layer to Bottom Layer, tented top, 108 vias

## Nets (pads, with @x,y where several pads share a name; then routed paths per layer and width w, separated by ;. In a path a pad name is that pad's centre, name@x,y a point inside that pad or via, vN(x,y) a via of type N, cw(c..) or ccw(c..) an arc to the next point about the centre after c; other vN are vias at no path point)
20MHZ_1: C3.1 U2.8 Y1.2
20MHZ_2: C8.1 U2.7 Y1.1
A: D1.1 J1_BUS2.5 J1_BUS3.5 U1.6
B: D1.2 J1_BUS2.4 J1_BUS3.4 U1.7
CLK: P1.3 U2.3 U3_SEGCTRL1.13 U3_SEGCTRL2.13 U3_SEGCTRL3.13 U3_SEGCTRL4.13
COM_485_EN: R1.1 U1.2 U1.3 U2.34
DI: R3.2 U1.4 U2.10
DOT_7SEG1: R6_7SEG1.2 U3_SEGCTRL1.17
DOT_7SEG2: R6_7SEG2.2 U3_SEGCTRL2.17
DOT_7SEG3: R6_7SEG3.2 U3_SEGCTRL3.17
DOT_7SEG4: R6_7SEG4.2 U3_SEGCTRL4.17
EXTSUPP: C10.1 C12.1 D6_7SEG1.A D6_7SEG2.A D6_7SEG3.A D6_7SEG4.A D7_L1.A D7_L2.A D7_L3.A D7_L4.A D7_L5.A D7_L6.A D7_L7.A D7_L8.A D7_L9.A D7_L10.A D7_L11.A D7_L12.A D7_L13.A D7_L14.A D7_L15.A D7_L16.A D7_L17.A D7_L18.A D7_L19.A D7_L20.A D7_L21.A D7_L22.A D7_L23.A D7_L24.A D7_L25.A D7_L26.A D7_L27.A D7_L28.A D12.1 D13.4 D15.1 U4.1
GND: C1.2 C2.2 C3.2 C4.2 C5.2 C6.2 C7.2 C8.2 C9_SEGCTRL1.2 C9_SEGCTRL2.2 C9_SEGCTRL3.2 C9_SEGCTRL4.2 C10.2 C11.2 C12.2 C13.2 D1.3 D13.3 D15.2 D16.2 P1.6 R1.2 R8.2 S1.2 U1.5 U2.6 U2.18 U2.28 U2.39 U3_SEGCTRL1.9 U3_SEGCTRL1.10 U3_SEGCTRL1.11 U3_SEGCTRL1.19 U3_SEGCTRL2.9 U3_SEGCTRL2.10 U3_SEGCTRL2.11 U3_SEGCTRL2.19 U3_SEGCTRL3.9 U3_SEGCTRL3.10 U3_SEGCTRL3.11 U3_SEGCTRL3.19 U3_SEGCTRL4.9 U3_SEGCTRL4.10 U3_SEGCTRL4.11 U3_SEGCTRL4.19 U4.4
IND: R5.2 U2.19
INPUT: P1.1 U2.1 U3_SEGCTRL4.3
MISO: P1.2 U2.2 U3_SEGCTRL1.18
NetD2_1: D2.1 R2.1
NetD3_1: D3.1 R3.1
NetD4_1: D4.1 R5.1
NetD6_7SEG1_K: D6_7SEG1.K R6_7SEG1.1
NetD6_7SEG2_K: D6_7SEG2.K R6_7SEG2.1
NetD6_7SEG3_K: D6_7SEG3.K R6_7SEG3.1
NetD6_7SEG4_K: D6_7SEG4.K R6_7SEG4.1
NetD7_L1_K: D7_L1.K D8_L1.A
NetD7_L2_K: D7_L2.K D8_L2.A
NetD7_L3_K: D7_L3.K D8_L3.A
NetD7_L4_K: D7_L4.K D8_L4.A
NetD7_L5_K: D7_L5.K D8_L5.A
NetD7_L6_K: D7_L6.K D8_L6.A
NetD7_L7_K: D7_L7.K D8_L7.A
NetD7_L8_K: D7_L8.K D8_L8.A
NetD7_L9_K: D7_L9.K D8_L9.A
NetD7_L10_K: D7_L10.K D8_L10.A
NetD7_L11_K: D7_L11.K D8_L11.A
NetD7_L12_K: D7_L12.K D8_L12.A
NetD7_L13_K: D7_L13.K D8_L13.A
NetD7_L14_K: D7_L14.K D8_L14.A
NetD7_L15_K: D7_L15.K D8_L15.A
NetD7_L16_K: D7_L16.K D8_L16.A
NetD7_L17_K: D7_L17.K D8_L17.A
NetD7_L18_K: D7_L18.K D8_L18.A
NetD7_L19_K: D7_L19.K D8_L19.A
NetD7_L20_K: D7_L20.K D8_L20.A
NetD7_L21_K: D7_L21.K D8_L21.A
NetD7_L22_K: D7_L22.K D8_L22.A
NetD7_L23_K: D7_L23.K D8_L23.A
NetD7_L24_K: D7_L24.K D8_L24.A
NetD7_L25_K: D7_L25.K D8_L25.A
NetD7_L26_K: D7_L26.K D8_L26.A
NetD7_L27_K: D7_L27.K D8_L27.A
NetD7_L28_K: D7_L28.K D8_L28.A
NetD8_L1_K: D8_L1.K D9_L1.A
NetD8_L2_K: D8_L2.K D9_L2.A
NetD8_L3_K: D8_L3.K D9_L3.A
NetD8_L4_K: D8_L4.K D9_L4.A
NetD8_L5_K: D8_L5.K D9_L5.A
NetD8_L6_K: D8_L6.K D9_L6.A
NetD8_L7_K: D8_L7.K D9_L7.A
NetD8_L8_K: D8_L8.K D9_L8.A
NetD8_L9_K: D8_L9.K D9_L9.A
NetD8_L10_K: D8_L10.K D9_L10.A
NetD8_L11_K: D8_L11.K D9_L11.A
NetD8_L12_K: D8_L12.K D9_L12.A
NetD8_L13_K: D8_L13.K D9_L13.A
NetD8_L14_K: D8_L14.K D9_L14.A
NetD8_L15_K: D8_L15.K D9_L15.A
NetD8_L16_K: D8_L16.K D9_L16.A
NetD8_L17_K: D8_L17.K D9_L17.A
NetD8_L18_K: D8_L18.K D9_L18.A
NetD8_L19_K: D8_L19.K D9_L19.A
NetD8_L20_K: D8_L20.K D9_L20.A
NetD8_L21_K: D8_L21.K D9_L21.A
NetD8_L22_K: D8_L22.K D9_L22.A
NetD8_L23_K: D8_L23.K D9_L23.A
NetD8_L24_K: D8_L24.K D9_L24.A
NetD8_L25_K: D8_L25.K D9_L25.A
NetD8_L26_K: D8_L26.K D9_L26.A
NetD8_L27_K: D8_L27.K D9_L27.A
NetD8_L28_K: D8_L28.K D9_L28.A
NetD9_L1_K: D9_L1.K D10_L1.A
NetD9_L2_K: D9_L2.K D10_L2.A
NetD9_L3_K: D9_L3.K D10_L3.A
NetD9_L4_K: D9_L4.K D10_L4.A
NetD9_L5_K: D9_L5.K D10_L5.A
NetD9_L6_K: D9_L6.K D10_L6.A
NetD9_L7_K: D9_L7.K D10_L7.A
NetD9_L8_K: D9_L8.K D10_L8.A
NetD9_L9_K: D9_L9.K D10_L9.A
NetD9_L10_K: D9_L10.K D10_L10.A
NetD9_L11_K: D9_L11.K D10_L11.A
NetD9_L12_K: D9_L12.K D10_L12.A
NetD9_L13_K: D9_L13.K D10_L13.A
NetD9_L14_K: D9_L14.K D10_L14.A
NetD9_L15_K: D9_L15.K D10_L15.A
NetD9_L16_K: D9_L16.K D10_L16.A
NetD9_L17_K: D9_L17.K D10_L17.A
NetD9_L18_K: D9_L18.K D10_L18.A
NetD9_L19_K: D9_L19.K D10_L19.A
NetD9_L20_K: D9_L20.K D10_L20.A
NetD9_L21_K: D9_L21.K D10_L21.A
NetD9_L22_K: D9_L22.K D10_L22.A
NetD9_L23_K: D9_L23.K D10_L23.A
NetD9_L24_K: D9_L24.K D10_L24.A
NetD9_L25_K: D9_L25.K D10_L25.A
NetD9_L26_K: D9_L26.K D10_L26.A
NetD9_L27_K: D9_L27.K D10_L27.A
NetD9_L28_K: D9_L28.K D10_L28.A
NetD10_L1_K: D10_L1.K D11_L1.A
NetD10_L2_K: D10_L2.K D11_L2.A
NetD10_L3_K: D10_L3.K D11_L3.A
NetD10_L4_K: D10_L4.K D11_L4.A
NetD10_L5_K: D10_L5.K D11_L5.A
NetD10_L6_K: D10_L6.K D11_L6.A
NetD10_L7_K: D10_L7.K D11_L7.A
NetD10_L8_K: D10_L8.K D11_L8.A
NetD10_L9_K: D10_L9.K D11_L9.A
NetD10_L10_K: D10_L10.K D11_L10.A
NetD10_L11_K: D10_L11.K D11_L11.A
NetD10_L12_K: D10_L12.K D11_L12.A
NetD10_L13_K: D10_L13.K D11_L13.A
NetD10_L14_K: D10_L14.K D11_L14.A
NetD10_L15_K: D10_L15.K D11_L15.A
NetD10_L16_K: D10_L16.K D11_L16.A
NetD10_L17_K: D10_L17.K D11_L17.A
NetD10_L18_K: D10_L18.K D11_L18.A
NetD10_L19_K: D10_L19.K D11_L19.A
NetD10_L20_K: D10_L20.K D11_L20.A
NetD10_L21_K: D10_L21.K D11_L21.A
NetD10_L22_K: D10_L22.K D11_L22.A
NetD10_L23_K: D10_L23.K D11_L23.A
NetD10_L24_K: D10_L24.K D11_L24.A
NetD10_L25_K: D10_L25.K D11_L25.A
NetD10_L26_K: D10_L26.K D11_L26.A
NetD10_L27_K: D10_L27.K D11_L27.A
NetD10_L28_K: D10_L28.K D11_L28.A
NetD11_L1_K: D11_L1.K R7_L1.1
NetD11_L2_K: D11_L2.K R7_L2.1
NetD11_L3_K: D11_L3.K R7_L3.1
NetD11_L4_K: D11_L4.K R7_L4.1
NetD11_L5_K: D11_L5.K R7_L5.1
NetD11_L6_K: D11_L6.K R7_L6.1
NetD11_L7_K: D11_L7.K R7_L7.1
NetD11_L8_K: D11_L8.K R7_L8.1
NetD11_L9_K: D11_L9.K R7_L9.1
NetD11_L10_K: D11_L10.K R7_L10.1
NetD11_L11_K: D11_L11.K R7_L11.1
NetD11_L12_K: D11_L12.K R7_L12.1
NetD11_L13_K: D11_L13.K R7_L13.1
NetD11_L14_K: D11_L14.K R7_L14.1
NetD11_L15_K: D11_L15.K R7_L15.1
NetD11_L16_K: D11_L16.K R7_L16.1
NetD11_L17_K: D11_L17.K R7_L17.1
NetD11_L18_K: D11_L18.K R7_L18.1
NetD11_L19_K: D11_L19.K R7_L19.1
NetD11_L20_K: D11_L20.K R7_L20.1
NetD11_L21_K: D11_L21.K R7_L21.1
NetD11_L22_K: D11_L22.K R7_L22.1
NetD11_L23_K: D11_L23.K R7_L23.1
NetD11_L24_K: D11_L24.K R7_L24.1
NetD11_L25_K: D11_L25.K R7_L25.1
NetD11_L26_K: D11_L26.K R7_L26.1
NetD11_L27_K: D11_L27.K R7_L27.1
NetD11_L28_K: D11_L28.K R7_L28.1
NetD14_1: D14.1 R8.1
NetU3_SEGCTRL1_3: U3_SEGCTRL1.3 U3_SEGCTRL2.18
NetU3_SEGCTRL2_3: U3_SEGCTRL2.3 U3_SEGCTRL3.18
NetU3_SEGCTRL3_3: U3_SEGCTRL3.3 U3_SEGCTRL4.18
PIN_A: U2.33
PIN_B: U2.32
PIN_C: U2.31
PIN_D: U2.30
POWER_V+: D13.1 J1_BUS2.7 J1_BUS2.8 J1_BUS3.7 J1_BUS3.8
POWER_V-: D13.2 J1_BUS2.1 J1_BUS2.2 J1_BUS3.1 J1_BUS3.2
RCK: U2.37 U3_SEGCTRL1.12 U3_SEGCTRL2.12 U3_SEGCTRL3.12 U3_SEGCTRL4.12
RO: R2.2 U1.1 U2.9
RST: C2.1 P1.4 R4.1 S1.1 U2.4
SEGA_7SEG1: R7_L7.2 U3_SEGCTRL1.5
SEGA_7SEG2: R7_L14.2 U3_SEGCTRL2.5
SEGA_7SEG3: R7_L21.2 U3_SEGCTRL3.5
SEGA_7SEG4: R7_L28.2 U3_SEGCTRL4.5
SEGB_7SEG1: R7_L5.2 U3_SEGCTRL1.4
SEGB_7SEG2: R7_L12.2 U3_SEGCTRL2.4
SEGB_7SEG3: R7_L19.2 U3_SEGCTRL3.4
SEGB_7SEG4: R7_L26.2 U3_SEGCTRL4.4
SEGC_7SEG1: R7_L6.2 U3_SEGCTRL1.15
SEGC_7SEG2: R7_L13.2 U3_SEGCTRL2.15
SEGC_7SEG3: R7_L20.2 U3_SEGCTRL3.15
SEGC_7SEG4: R7_L27.2 U3_SEGCTRL4.15
SEGD_7SEG1: R7_L4.2 U3_SEGCTRL1.14
SEGD_7SEG2: R7_L11.2 U3_SEGCTRL2.14
SEGD_7SEG3: R7_L18.2 U3_SEGCTRL3.14
SEGD_7SEG4: R7_L25.2 U3_SEGCTRL4.14
SEGE_7SEG1: R7_L3.2 U3_SEGCTRL1.6
SEGE_7SEG2: R7_L10.2 U3_SEGCTRL2.6
SEGE_7SEG3: R7_L17.2 U3_SEGCTRL3.6
SEGE_7SEG4: R7_L24.2 U3_SEGCTRL4.6
SEGF_7SEG1: R7_L2.2 U3_SEGCTRL1.16
SEGF_7SEG2: R7_L9.2 U3_SEGCTRL2.16
SEGF_7SEG3: R7_L16.2 U3_SEGCTRL3.16
SEGF_7SEG4: R7_L23.2 U3_SEGCTRL4.16
SEGG_7SEG1: R7_L1.2 U3_SEGCTRL1.7
SEGG_7SEG2: R7_L8.2 U3_SEGCTRL2.7
SEGG_7SEG3: R7_L15.2 U3_SEGCTRL3.7
SEGG_7SEG4: R7_L22.2 U3_SEGCTRL4.7
USART1_RX: U2.11
USART1_TX: U2.12
VCC: C1.1 C4.1 C5.1 C6.1 C7.1 C9_SEGCTRL1.1 C9_SEGCTRL2.1 C9_SEGCTRL3.1 C9_SEGCTRL4.1 C11.1 C13.1 D2.2 D3.2 D4.2 D12.2 D14.2 D16.1 P1.5 R4.2 U1.8 U2.5 U2.17 U2.27 U2.38 U3_SEGCTRL1.2 U3_SEGCTRL1.8 U3_SEGCTRL2.2 U3_SEGCTRL2.8 U3_SEGCTRL3.2 U3_SEGCTRL3.8 U3_SEGCTRL4.2 U3_SEGCTRL4.8 U4.3
pads on no net: J1_BUS2.3 J1_BUS2.6 J1_BUS2.MH1 J1_BUS2.MH2 J1_BUS3.3 J1_BUS3.6 J1_BUS3.MH1 J1_BUS3.MH2 U2.13 U2.14 U2.15 U2.16 U2.20 U2.21 U2.22 U2.23 U2.24 U2.25 U2.26 U2.29 U2.35 U2.36 U2.40 U2.41 U2.42 U2.43 U2.44 U3_SEGCTRL1.1 U3_SEGCTRL1.20 U3_SEGCTRL1.21 U3_SEGCTRL2.1 U3_SEGCTRL2.20 U3_SEGCTRL2.21 U3_SEGCTRL3.1 U3_SEGCTRL3.20 U3_SEGCTRL3.21 U3_SEGCTRL4.1 U3_SEGCTRL4.20 U3_SEGCTRL4.21
copper on no net:
  other v1: 225.7,48.3 226.9,48.3 228.1,48.3 229.3,48.3 230.5,48.3 231.7,48.3 232.9,48.3 234.1,48.3 235.3,48.3 225.7,49.5 226.9,49.5 228.1,49.5 229.3,49.5 230.5,49.5 231.7,49.5 232.9,49.5 234.1,49.5 235.3,49.5 225.7,50.7 226.9,50.7 228.1,50.7 229.3,50.7 230.5,50.7 231.7,50.7 232.9,50.7 234.1,50.7 235.3,50.7 60.904,59.444 62.104,59.444 63.304,59.444 64.504,59.444 65.704,59.444 66.904,59.444 68.104,59.444 69.304,59.444 70.504,59.444 317.063,60.596 318.263,60.596 319.463,60.596 320.663,60.596 321.863,60.596 323.063,60.596 324.263,60.596 325.463,60.596 326.663,60.596 60.904,60.644 62.104,60.644 63.304,60.644 64.504,60.644 65.704,60.644 66.904,60.644 68.104,60.644 69.304,60.644 70.504,60.644 317.063,61.796 318.263,61.796 319.463,61.796 320.663,61.796 321.863,61.796 323.063,61.796 324.263,61.796 325.463,61.796 326.663,61.796 60.904,61.844 62.104,61.844 63.304,61.844 64.504,61.844 65.704,61.844 66.904,61.844 68.104,61.844 69.304,61.844 70.504,61.844 317.063,62.996 318.263,62.996 319.463,62.996 320.663,62.996 321.863,62.996 323.063,62.996 324.263,62.996 325.463,62.996 326.663,62.996 133.17,71.94 134.37,71.94 135.57,71.94 136.77,71.94 137.97,71.94 139.17,71.94 140.37,71.94 141.57,71.94 142.77,71.94 133.17,73.14 134.37,73.14 135.57,73.14 136.77,73.14 137.97,73.14 139.17,73.14 140.37,73.14 141.57,73.14 142.77,73.14 133.17,74.34 134.37,74.34 135.57,74.34 136.77,74.34 137.97,74.34 139.17,74.34 140.37,74.34 141.57,74.34 142.77,74.34

## Silkscreen, mask and mechanical layers (free items; w line width, h text height)
Top Overlay:
  lines w0.254: 19.5,64 379.5,64 ; 20,164 380,164

## Text inside footprints (layer, text, board x,y; h text height)
C10: Top Overlay "+" at 65.58,25.183 h2.5 r180
C11: Top Overlay "+" at 65.58,38.683 h2.5 r180
D13: Top Overlay "-" at 52.516,26.222 h1.52; Top Overlay "+" at 52.389,29.016 h1.52; Top Overlay "~" at 49.849,26.349 h1.52; Top Overlay "~" at 49.849,29.016 h1.52